# EAGLE board Adafruit Flora TCS34725 (EAGLE 6.6.0)
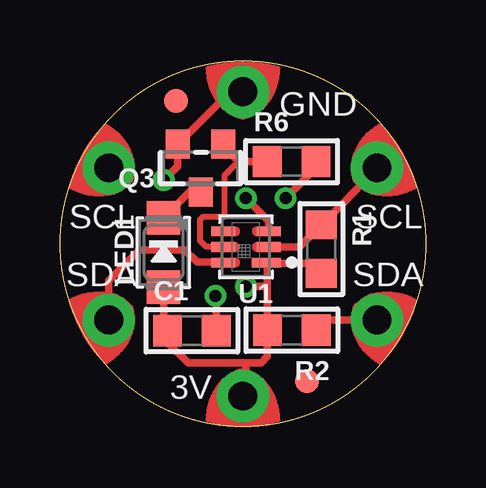
[diagram p0: board, top side]
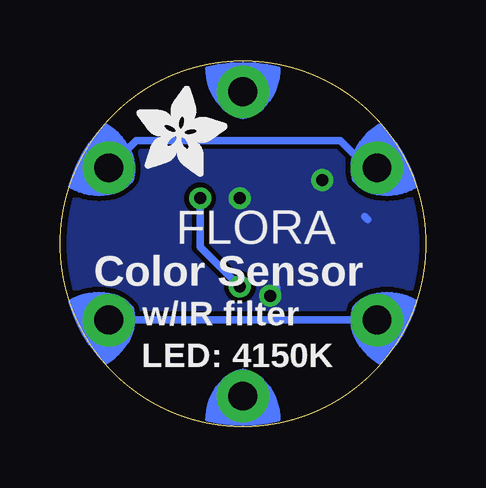
[diagram p1: board, bottom side, seen from below]

Size 15.24 x 15.24 mm. Coordinates in mm from the lower left corner, seen from the top.
Outline: circle at 7.62,7.62 radius 7.62
Copper layers (1*16): Top 0.035mm / dielectric 1.5mm / Bottom 0.035mm
Design rules "default": minimum track width 8mil, minimum drill 16mil, track to track 8mil, track to pad 8mil, pad to pad 8mil, via to via 8mil, smd to smd 8mil, copper to edge 10mil, drill to drill 8mil, minimum pad ring 10mil, minimum via ring 8mil, stop-mask expansion 4mil, vias tented up to drill 20mil, thermal gap 10mil

## Footprints (pad centres in the part's own frame; a part is rotated, then mirrored left to right if it is on the bottom)
_0805 = smd 1.2 x 1.3: 1 -1.016,0; 2 1.016,0
FIDUCIAL_1MM = smd 1 x 1: 1 0,0
EVERLIGHT_45-21 = smd 1.4 x 1.4: A -1.45,0; K 1.45,0
SOT23-WIDE = smd 1 x 1.2: 1 -0.95,-1; 2 0.95,-1; 3 0,1
SEWINGTAP_0.5 = drill 1.2 pad 2.184: TAP 0,0
TCS3472_FN6 = smd 1.2 x 0.4: P$1 -0.85,0.65 | smd 1 x 0.4: P$2 -0.95,0; P$3 -0.95,-0.65; P$4 0.95,-0.65; P$5 0.95,0; P$6 0.95,0.65

## Placement (x,y rotation side)
C1  0.1µF  [_0805]  5.5,4 0 top
FID1  FIDUCIAL""  [FIDUCIAL_1MM]  4.83,13.59 0 top
FID2  FIDUCIAL""  [FIDUCIAL_1MM]  10.29,1.91 0 top
LED1  45-21/LK2C-B38452C4CB2/2T  [EVERLIGHT_45-21]  4.32,7.26 90 top
Q3  BSS138  [SOT23-WIDE]  5.86,10.79 180 top
R1  10K  [_0805]  10.89,7.4 270 top
R2  10K  [_0805]  9.66,4.02 180 top
R6  10K  [_0805]  9.65,11.05 0 top
TP1  SEWTAP0.5IN  [SEWINGTAP_0.5]  7.62,1.27 180 top
TP2  SEWTAP0.5IN  [SEWINGTAP_0.5]  7.62,13.97 0 top
TP3  SEWTAP0.5IN  [SEWINGTAP_0.5]  2.03,4.45 120 top
TP4  SEWTAP0.5IN  [SEWINGTAP_0.5]  13.21,4.45 240 top
TP5  SEWTAP0.5IN  [SEWINGTAP_0.5]  2.03,10.79 60 top
TP6  SEWTAP0.5IN  [SEWINGTAP_0.5]  13.21,10.79 300 top
U1  TCS34725  [TCS3472_FN6]  7.75,7.49 180 top
U$8  [ADAFRUIT_3.5MM]  12.07,10.41 0 bottom

## Library data of the parts
C1 LED1 Q3 R1 R2 R6 U1 U$8 = microbuilder
FID1 FID2 = microbuilder; BOM: EXCLUDE
TP1-TP6 = adafruit

## Nets
+3V3: C1.1 LED1.A R1.2 R2.2 R6.2 TP1.TAP U1.P$1
GND: C1.2 Q3.2 TP2.TAP U1.P$3
INT: Q3.1 R6.1 U1.P$5
N$1: LED1.K Q3.3
SCL_3V: R1.1 TP5.TAP TP6.TAP U1.P$2
SDA_3V: R2.1 TP3.TAP TP4.TAP U1.P$6

## Tracks (layer width: path | path; a pad name or v marks a point on that pad's centre or on a via)
+3V3  (via drill 0.5)
  Top 0.305: LED1.A 4.32,4.17 C1.1 4.48,3.52 5.33,2.67 7.75,2.67 | U1.P$1 8.64,6.8 | 8.64,6.8 8.64,5.97 | 8.64,5.97 R2.2 8.64,2.93 8.38,2.67 7.75,2.67 | 8.64,6.8 10.48,6.8 R1.2 | R6.2 10.67,10.79 v9.4,9.53 | 11.05,6.22 R1.2 | TP1.TAP 7.75,1.27 7.75,2.67 | 11.34,6.38 R1.2 | v7.75,5.84 8.52,5.84 8.64,5.97
  Bottom 0.305: v9.4,9.53 9.4,7.49 v7.75,5.84
GND  (via drill 0.5)
  Top 0.254: 4.91,11.26 4.91,11.38
  Top 0.305: U1.P$3 8.7,8.57 v7.75,9.53 | C1.2 6.51,5.46 v6.48,5.46 | 4.91,11.38 Q3.2 7.09,13.97 TP2.TAP | 4.91,11.26 4.91,10.88 v4.32,10.29
  Bottom 0.305: 7.75,13.97 TP2.TAP | v6.48,5.46 arc-90 6.22,5.84 | 2.54,8.76 2.41,8.64
  pour Bottom: 7.62,15.11 arc-90 15.11,7.24 15.11,6.22 arc-90 7.62,-0.13 arc-90 -0.13,7.62 -0.13,8 arc-90 7.49,14.99
INT
  Top 0.254: U1.P$5 6.1,7.49 5.84,7.75 5.84,8.64 5.97,8.76 6.86,8.76 6.86,10.49 7.42,11.05
  Top 0.305: Q3.1 7.42,11.05 R6.1
N$1
  Top 0.305: LED1.K 5.39,9.79 Q3.3
SCL_3V
  Top 0.305: U1.P$2 9.97,7.49 R1.1 | R1.1 | R1.1 13.21,10.73 TP6.TAP
  Bottom 0.305: TP5.TAP 2.41,10.79 3.56,11.94 12.07,11.94 TP6.TAP
SDA_3V
  Top 0.305: TP3.TAP 2.03,6.1 3.3,7.37 5.21,7.37 5.71,6.86 6.78,6.86 U1.P$6 | R2.1 11.1,4.45 TP4.TAP
  Bottom 0.305: TP3.TAP TP4.TAP

## Text on the board
tPlace: GND | SCL | SCL | SDA | SDA | 3V
bPlace: FLORA | Color Sensor | w/IR filter | LED: 4150K